# Altium PCB PCB1.PcbDoc (part 1 of 2)
Units mm, origin at the board's own origin, x right, y up, seen from the top; angles counter-clockwise.
Board outline 158 x 54 mm, 2 copper layers (Top Layer, Bottom Layer); 125 components, 171 nets, 620 pads, 107 vias.
Unrouted connection lines stored in the file: 178.
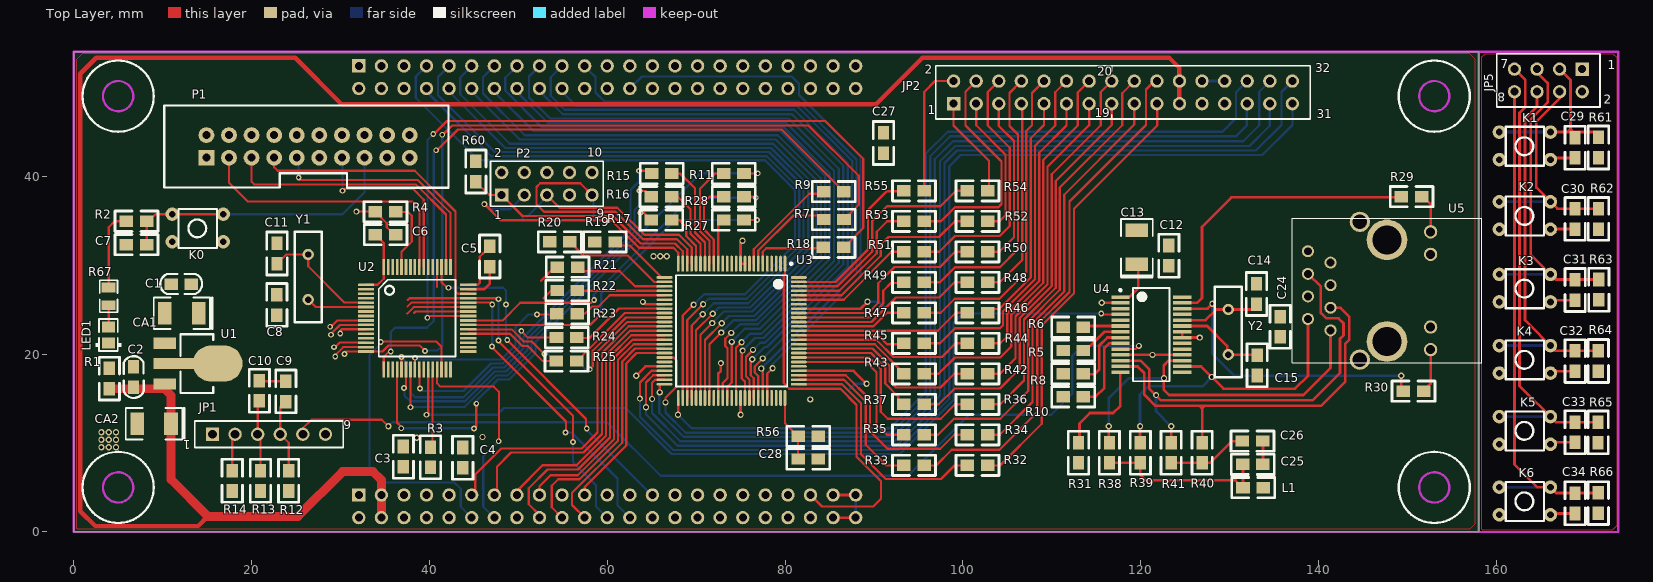
[diagram p0: Top Layer view]
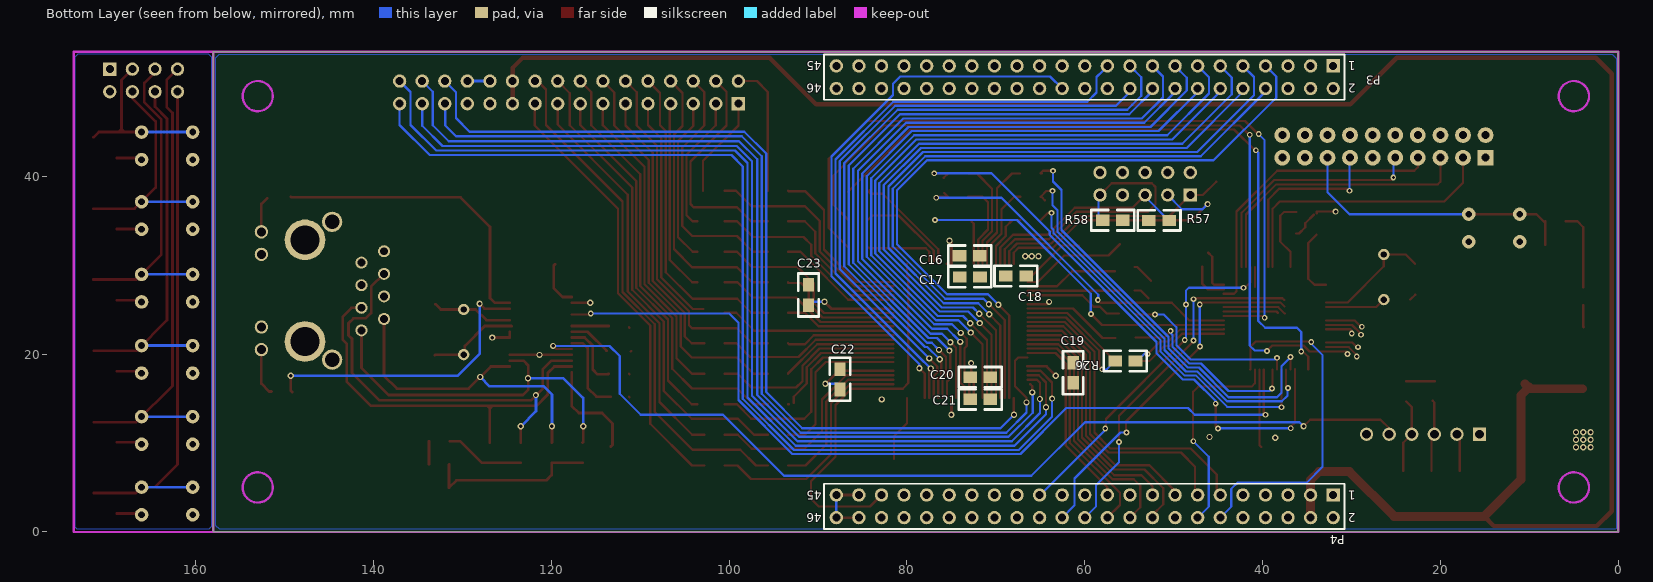
[diagram p1: Bottom Layer view, seen from below]

## Layer stack, top to bottom
Top Solder: solder mask 0.0102, Solder Resist, Dk 3.5
Top Layer: signal copper 0.0356
Dielectric1: dielectric 0.32, FR-4, Dk 4.8
Bottom Layer: signal copper 0.0356
Bottom Solder: solder mask 0.0102, Solder Resist, Dk 3.5

## Board outline
0,0 0,54 158,54 158,0

## Design rules (kind name [scope] priority, off if disabled: settings)
Clearance Clearance_2 [InNetClass('SMALL_CLEARANCE','CPLDDATA')] p1: gap=0.2
Clearance Clearance_1 [InComponent('U2','U3','U4')] p2: gap=0.2
Clearance [All] p3: gap=0.254
ComponentClearance [All] p1: gap=0 collisioncheckmode=3 verticalgap=0 showdistances=FALSE
FabricationTestPointUsage TestPointUsage [All] p1: valid=0 allowmultiple=FALSE
FabricationTestpoint Testpoint [All] p1: side=3 testpointundercomponent=TRUE minsize=1.016 maxsize=2.54 preferedsize=1.524 minholesize=0 maxholesize=1.016 preferedholesize=0.813 testpointgrid=0.025 allowsidetop=TRUE allowsidebottom=TRUE usegrid=TRUE gridtolerance=0
HoleSize [All] p1: absolutevalues=TRUE maxlimit=4 minlimit=0.025 maxpercent=80.000 minpercent=20.000
PolygonConnect [All] p1: connectstyle=Relief reliefconductorwidth=0.5 reliefentries=4 polygonreliefangle="90 Angle" airgapwidth=0.254
RoutingVias [All] p1: holewidth=0.35 width=0.65 viastyle="Through Hole" minholewidth=0.35 minwidth=0.65 maxholewidth=0.711 maxwidth=3
SolderMaskExpansion [All] p1: expansion=0.102
Width [All] p1: maxlimit=2 minlimit=0.24 preferedwidth=0.3 minimp=50.000000 maximp=50.000000 favimp=50.000000
25 further rules are at their usual default settings.

## Classes and differential pairs
net class CPLDDATA: CPLD_R CPLD_W DB0 DB1 DB2 DB3 DB4 DB5 DB6 DB7 GND GPIO_20 I2C1_SDA-O KEY1 KEY2 KEY3 KEY4 KEY5 KEY6 NetR32_2 NetR33_2 NetR34_2 NetR35_2 NetR36_2 NetR37_2 NetR42_2 NetR43_2 NetR44_2 NetR45_2 NetR46_2 NetR47_2 NetR48_2 NetR49_2 NetR50_2 NetR51_2 NetR52_2 NetR53_2 NetR54_2 NetR55_2 OUT_C\S\ OUT_C\S\-O PA0 PA1 PA2 PA3 PA4 PA5 PA6 PA7 PB0 PB1 PB2 PB3 PB4 PB5 PB6 PB7 SPI1-MISO SPI1-MISO-O SPI1-MOSI SPI1-MOSI-O SPI1-NSS SPI1-NSS-O SPI1-SCK SPI1-SCK-O TCK TDI TDO TMS UART2_RX UART2_RX-O UART2_TX UART2_TX-O
net class SMALL_CLEARANCE: BOOT1 CANRX CANTX ENABLE1 ENABLE2 ENC-INT LCD_DATA0 LCD_DATA1 LCD_DATA2 LCD_DATA3 LCD_DATA4 LCD_DATA5 LCD_DATA6 LCD_DATA7 LCD_DATA8 LCD_DATA9 LCD_DATA10 LCD_DATA11 LCD_DATA12 LCD_DATA13 LCD_DATA14 LCD_DATA15 LCD_DE LCD_HSYNC NetR9_2 NetR11_2 NetR15_2 NetR16_2 NetR17_2 NetR20_2 NetR21_2 NetR23_2 NetR24_2 PA0 PA1 PA2 PA3 PA4 PA5 PA6 PA7 PB0 PB1 PB2 PB3 PB4 PB5 PB6 PB7 UART3_RX UART3_TX

## Components (designator, comment, footprint, x,y, rotation, side; value= is the part's Value field where it differs from the comment)
C1 "0.1uF" 0805_CAP 12.93,27.74 r180 top
C2 "0.1uF" 0805_CAP 6.61,16.57 r90 top
C3 "104" C0805 37.07,7.06 r270 top
C4 "104" C0805 43.75,6.95 r270 top
C5 "104" C0805 46.79,29.57 r270 top
C6 "104" C0805 36.47,33.42 r0 top
C7 "104" C0805 8.46,32.3 r0 top
C8 "Cap" C0805 22.84,24.13 r270 top
C9 "101" C0805 23.85,14.4 r270 top
C10 "101" C0805 20.88,14.48 r270 top
C11 "Cap" C0805 22.87,29.91 r270 top
C12 "Cap Semi" C0805 123.16,32.46 r90 top
C13 "Cap Pol3" 1210C 119.59,30.13 r90 top
C14 "Cap Semi" C0805 133.01,28.15 r90 top
C15 "Cap Semi" C0805 133.09,17.33 r270 top
C16 "Cap" C0805 74.34,31.06 r0 bottom
C17 "Cap" C0805 74.32,28.66 r0 bottom
C18 "Cap" C0805 66.35,28.77 r180 bottom
C19 "Cap" C0805 61.31,19.29 r90 bottom
C20 "Cap" C0805 70.35,17.4 r180 bottom
C21 "Cap" C0805 70.35,14.9 r180 bottom
C22 "Cap" C0805 87.53,18.55 r90 bottom
C23 "Cap" C0805 91.07,28.03 r90 bottom
C24 "Cap Semi" C0805 135.67,21.67 r270 top
C25 "Cap Semi" C0805 131.2,7.59 r180 top
C26 "Cap Semi" C0805 131.17,10.21 r180 top
C27 "Cap" C0805 91.07,42.34 r270 top
C28 "Cap" C0805 81.21,8.2 r180 top
C29 "104" C0805 168.84,44.59 r90 top
C30 "104" C0805 168.84,36.594 r90 top
C31 "104" C0805 168.84,28.598 r90 top
C32 "104" C0805 168.84,20.602 r90 top
C33 "104" C0805 168.84,12.606 r90 top
C34 "104" C0805 168.84,4.61 r90 top
CA1 "4.7UF/16V" 3528cap 14.05,24.61 r180 top
CA2 "10UF/16V" 3528cap 10.92,12.18 r180 top
JP1 "ISP" PIN-FHEADER-1*6-2.54 15.61,10.98 r0 top
JP2 "Header2*16" PIN-S-2.54-2*16 98.95,48.18 r0 top locked
JP5 "Header2*4" PIN-S-2.54-2*4 169.64,52.04 r180 top
K0 "KEY" KEY-DIP 13.9,34.14 r180 top
K1 "SW-SPST" KEY-DIP 163.14,43.37 r180 top
K2 "SW-SPST" KEY-DIP 163.14,35.54 r180 top
K3 "SW-SPST" KEY-DIP 163.14,27.37 r180 top
K4 "SW-SPST" KEY-DIP 163.14,19.36 r180 top
K5 "SW-SPST" KEY-DIP 163.14,11.37 r180 top
K6 "SW-SPST" KEY-DIP 163.14,3.44 r180 top
L1 "Inductor" R0805 132.41,5.12 r180 top
LED1 "0805/Green" LED-0805 3.01,23.64 r270 top
P1 "Header 10X2" IDC-20 14.9,42.08 r0 top
P2 "Header 5X2" HDR2X5 48.13,37.88 r0 top
P3 "Header 23X2" HDR2X23 32.06,52.4 r0 bottom
P4 "Header 23X2" HDR2X23 32.06,4.144 r0 bottom
R1 "10K" 0805 4.01,18.38 r270 top
R2 "10k" R0805 7.29,34.78 r0 top
R3 "Res2" R0805 40.28,8.62 r90 top
R4 "Res2" R0805 35.29,35.84 r0 top
R5 "Res Semi" R0805 112.63,20.25 r0 top
R6 "Res Semi" R0805 112.63,22.86 r0 top
R7 "Res Semi" R0805 85.71,34.975 r0 top
R8 "Res Semi" R0805 112.63,17.63 r0 top
R9 "Res Semi" R0805 85.7,38.11 r0 top
R10 "Res Semi" R0805 112.63,15.04 r0 top
R11 "Res Semi" R0805 74.466,40.145 r0 top
R12 "Res2" R0805 24.03,5.51 r270 top
R13 "Res2" R0805 20.855,5.51 r270 top
R14 "Res2" R0805 17.68,5.51 r270 top
R15 "Res Semi" R0805 65.9,40.45 r180 top
R16 "Res Semi" R0805 65.88,37.84 r180 top
R17 "Res Semi" R0805 65.86,35.217 r180 top
R18 "Res Semi" R0805 85.68,31.84 r0 top
R19 "Res Semi" R0805 59.51,32.76 r180 top
R20 "Res Semi" R0805 54.43,32.77 r180 top
R21 "Res Semi" R0805 55.31,29.92 r180 top
R22 "Res Semi" R0805 55.28,27.3 r180 top
R23 "Res Semi" R0805 55.26,24.67 r180 top
R24 "Res Semi" R0805 55.21,22 r180 top
R25 "Res Semi" R0805 55.19,19.36 r180 top
R26 "Res Semi" R0805 55.21,19.06 r180 bottom
R27 "Res Semi" R0805 74.466,34.913 r0 top
R28 "Res Semi" R0805 74.466,37.535 r0 top
R29 "Res Semi" R0805 150.68,37.55 r0 top
R30 "Res Semi" R0805 150.9,15.67 r0 top
R31 "Res Semi" R0805 113.15,9.13 r90 top
R32 "Res2" R0805 101.404,7.63 r180 top
R33 "Res2" R0805 94.274,7.63 r180 top
R34 "Res2" R0805 101.404,11.061 r180 top
R35 "Res2" R0805 94.274,11.061 r180 top
R36 "Res2" R0805 101.404,14.492 r180 top
R37 "Res2" R0805 94.274,14.492 r180 top
R38 "Res Semi" R0805 116.625,9.13 r90 top
R39 "Res Semi" R0805 120.1,9.13 r90 top
R40 "Res Semi" R0805 127.05,9.13 r90 top
R41 "Res Semi" R0805 123.575,9.13 r90 top
R42 "Res2" R0805 101.404,17.923 r180 top
R43 "Res2" R0805 94.274,17.923 r180 top
R44 "Res2" R0805 101.404,21.355 r180 top
R45 "Res2" R0805 94.274,21.355 r180 top
R46 "Res2" R0805 101.404,24.786 r180 top
R47 "Res2" R0805 94.274,24.786 r180 top
R48 "Res2" R0805 101.404,28.217 r180 top
R49 "Res2" R0805 94.274,28.217 r180 top
R50 "Res2" R0805 101.404,31.648 r180 top
R51 "Res2" R0805 94.274,31.648 r180 top
R52 "Res2" R0805 101.404,35.079 r180 top
R53 "Res2" R0805 94.274,35.079 r180 top
R54 "Res2" R0805 101.404,38.51 r180 top
R55 "Res2" R0805 94.274,38.51 r180 top
R56 "Res2" R0805 82.83,10.59 r0 top
R57 "Res2" R0805 51.87,35.18 r0 bottom
R58 "Res2" R0805 56.62,34.89 r180 bottom
R60 "Res2" R0805 45.07,40.3 r270 top
R61 "Res2" R0805 171.32,42.99 r270 top
R62 "Res2" R0805 171.32,34.97 r270 top
R63 "Res2" R0805 171.35,27.01 r270 top
R64 "Res2" R0805 171.29,18.99 r270 top
R65 "Res2" R0805 171.27,10.96 r270 top
R66 "Res2" R0805 171.29,3.01 r270 top
R67 "1K/1%/0805/1/8W" R-0805 4.83,24.99 r90 top
U1 "AS1117-3.3V" SOT-223 16.17,18.93 r270 top
U2 "STM32" LQFP64 32.87,27.78 r0 top locked
U3 "EPM240GT100C5N" TQFP100_N 73.99,22.61 r270 top locked
U4 "ENC28J60" ENC28J60-ss 121.18,22.18 r0 top
U5 "HR911105A-RJ45" HR911105A 147.69,27.12 r270 top locked
Y1 "8MHZ" XTAL 26.37,26.12 r90 top
Y2 "25M" xtal 129.84,25.01 r270 top

## Footprints (in the part's own frame and the unit in brackets; to place one, negate y for a bottom-side part, rotate by r counter-clockwise, add the part's x,y. Pads: shape width x height; smd on the part's side, far side on the other; paste and mask are expansions set on the pad)
0805 [mil]
  rect 60x50 smd: 1(0,0) 2(90,0)
  silkscreen extent -50,-45 140,45
0805_CAP [mm]
  rect 1.524x1.27 smd: 1(-0.31,-0.11) 2(1.976,-0.11)
  silkscreen extent -1.51,-1.26 3.19,0.99
1210C [mil]
  rect 60x100 smd: 1(-1,1) 2(149,1)
  silkscreen extent -61,-69 199,71
3528cap [mil]
  rect 60x100 smd: 1(-1,1) 2(149,1)
  silkscreen extent -61,-69 199,71
C0805 [mil]
  rect 60x50 smd: 1(-100,0) 2(-10,0)
  silkscreen extent -150,-45 40,45
ENC28J60-ss [mm] "SOP, 28-Leads, Body 10.5x5.6mm (max), Pitch 0"
  rect 2.05x0.4 smd: 1(-3.475,4.225) 2(-3.475,3.575) 3(-3.475,2.925) 4(-3.475,2.275) 5(-3.475,1.625) 6(-3.475,0.975) 7(-3.475,0.325) 8(-3.475,-0.325) 9(-3.475,-0.975) 10(-3.475,-1.625) 11(-3.475,-2.275) 12(-3.475,-2.925) 13(-3.475,-3.575) 14(-3.475,-4.225) 15(3.475,-4.225) 16(3.475,-3.575) 17(3.475,-2.925) 18(3.475,-2.275) 19(3.475,-1.625) 20(3.475,-0.975) 21(3.475,-0.325) 22(3.475,0.325) 23(3.475,0.975) 24(3.475,1.625) 25(3.475,2.275) 26(3.475,2.925) 27(3.475,3.575) 28(3.475,4.225)
  silkscreen extent -3.6,-5.25 2.05,5.25, body extent -2.8,-5.25 2.8,5.25, height 2
HDR2X5 [mm] "Connector; Header; 5x2 Position"
  rect 1.5x1.5 hole 0.9: 1(0,0)
  round 1.5 hole 0.9: 2(0,2.54) 3(2.54,0) 4(2.54,2.54) 5(5.08,0) 6(5.08,2.54) 7(7.62,0) 8(7.62,2.54) 9(10.16,0) 10(10.16,2.54)
  silkscreen extent -1.27,-1.27 11.43,3.81
HDR2X23 [mm] "Connector; Header; 23x2 Position"
  rect 1.5x1.5 hole 0.9: 1(0,0)
  round 1.5 hole 0.9: 2(0,2.54) 3(2.54,0) 4(2.54,2.54) 5(5.08,0) 6(5.08,2.54) 7(7.62,0) 8(7.62,2.54) 9(10.16,0) 10(10.16,2.54) 11(12.7,0) 12(12.7,2.54) 13(15.24,0) 14(15.24,2.54) 15(17.78,0) 16(17.78,2.54) 17(20.32,0) 18(20.32,2.54) 19(22.86,0) 20(22.86,2.54) 21(25.4,0) 22(25.4,2.54) 23(27.94,0) 24(27.94,2.54) 25(30.48,0) 26(30.48,2.54) 27(33.02,0) 28(33.02,2.54) 29(35.56,0) 30(35.56,2.54) 31(38.1,0) 32(38.1,2.54) 33(40.64,0) 34(40.64,2.54) 35(43.18,0) 36(43.18,2.54) 37(45.72,0) 38(45.72,2.54) 39(48.26,0) 40(48.26,2.54) 41(50.8,0) 42(50.8,2.54) 43(53.34,0) 44(53.34,2.54) 45(55.88,0) 46(55.88,2.54)
  silkscreen extent -1.27,-1.27 57.28,3.81
HR911105A [mm]
  round 1.35 hole 0.89: 1(4.46,-6.35) 2(3.18,-8.89) 3(1.92,-6.35) 4(0.64,-8.89) 5(-0.62,-6.35) 6(-1.9,-8.89) 7(-3.16,-6.35) 8(-4.44,-8.89)
  round 1.5 hole 1.02: 9(6.625,4.9) 10(4.085,4.9) 11(-4.085,4.9) 12(-6.625,4.9)
  round 2.286 hole 1.63: ""(-7.745,-3.05) ""(7.745,-3.05)
  round 4.572 hole 3.25: ""(-5.715,0) ""(5.715,0)
  silkscreen extent -8.13,-10.67 8.13,10.67
IDC-20 [mil]
  rect 70x70 hole 35: 1(1,0)
  round 70 hole 35: 2(1,100) 3(101,0) 4(101,100) 5(201,0) 6(201,100) 7(301,0) 8(301,100) 9(401,0) 10(401,100) 11(501,0) 12(501,100) 13(601,0) 14(601,100) 15(701,0) 16(701,100) 17(801,0) 18(801,100) 19(901,0) 20(901,100)
  silkscreen extent -185,-133 1073,231
KEY-DIP [mil]
  round 60 hole 30: 1(-115,59.45) 2(-115,-62.6) 3(111,-62.6) 4(111,59.45)
  silkscreen extent -87,-86 83,87
LED-0805 [mm]
  rect 1.2x1.5 smd: 1(0.6,0.9) 2(2.4,0.9)
  silkscreen extent -0.3,-0.55 3.3,2.35
LQFP64 [mm]
  oval 1.8x0.3 smd: 1(0,0)
  rect 1.8x0.3 smd: 2(0,-0.5) 3(0,-1) 4(0,-1.5) 5(0,-2) 6(0,-2.5) 7(0,-3) 8(0,-3.5) 9(0,-4) 10(0,-4.5) 11(0,-5) 12(0,-5.5) 13(0,-6) 14(0,-6.5) 15(0,-7) 16(0,-7.5) 33(11.5,-7.5) 34(11.5,-7) 35(11.5,-6.5) 36(11.5,-6) 37(11.5,-5.5) 38(11.5,-5) 39(11.5,-4.5) 40(11.5,-4) 41(11.5,-3.5) 42(11.5,-3) 43(11.5,-2.5) 44(11.5,-2) 45(11.5,-1.5) 46(11.5,-1) 47(11.5,-0.5) 48(11.5,0)
  rect 0.3x1.8 smd: 17(2,-9.5) 18(2.5,-9.5) 19(3,-9.5) 20(3.5,-9.5) 21(4,-9.5) 22(4.5,-9.5) 23(5,-9.5) 24(5.5,-9.5) 25(6,-9.5) 26(6.5,-9.5) 27(7,-9.5) 28(7.5,-9.5) 29(8,-9.5) 30(8.5,-9.5) 31(9,-9.5) 32(9.5,-9.5) 49(9.5,2) 50(9,2) 51(8.5,2) 52(8,2) 53(7.5,2) 54(7,2) 55(6.5,2) 56(6,2) 57(5.5,2) 58(5,2) 59(4.5,2) 60(4,2) 61(3.5,2) 62(3,2) 63(2.5,2) 64(2,2)
  silkscreen extent 1.43,-8.07 10.07,0.56
PIN-FHEADER-1*6-2.54 [mm]
  rect 1.5x1.5 hole 1: 1(0,0)
  round 1.5 hole 1: 2(2.54,0) 3(5.08,0) 4(7.62,0) 5(10.16,0) 6(12.7,0)
  silkscreen extent -2,-1.5 14.7,1.5
PIN-S-2.54-2*4 [mm]
  rect 1.5x1.5 hole 0.9: 1(0,0)
  round 1.5 hole 0.9: 2(0,2.54) 3(2.54,0) 4(2.54,2.54) 5(5.08,0) 6(5.08,2.54) 7(7.62,0) 8(7.62,2.54)
  silkscreen extent -2,-1.73 9.62,4.27
PIN-S-2.54-2*16 [mm]
  rect 1.5x1.5 hole 0.9: 1(0,-0.025)
  round 1.5 hole 0.9: 2(0,2.515) 3(2.54,-0.025) 4(2.54,2.515) 5(5.08,-0.025) 6(5.08,2.515) 7(7.62,-0.025) 8(7.62,2.515) 9(10.16,-0.025) 10(10.16,2.515) 11(12.7,-0.025) 12(12.7,2.515) 13(15.24,-0.025) 14(15.24,2.515) 15(17.78,-0.025) 16(17.78,2.515) 17(20.32,-0.025) 18(20.32,2.515) 19(22.86,-0.025) 20(22.86,2.515) 21(25.4,-0.025) 22(25.4,2.515) 23(27.94,-0.025) 24(27.94,2.515) 25(30.48,-0.025) 26(30.48,2.515) 27(33.02,-0.025) 28(33.02,2.515) 29(35.56,-0.025) 30(35.56,2.515) 31(38.1,-0.025) 32(38.1,2.515)
  silkscreen extent -2,-1.76 40.1,4.24
R0805 [mil]
  rect 60x50 smd: 1(-54,6) 2(36,6)
  silkscreen extent -104,-39 86,51
R-0805 [mm]
  rect 1.1x1.6 smd: 1(0.5,0.9) 2(2.5,0.9)
  silkscreen extent -0.3,-0.1 3.3,1.9
SOT-223 [mil]
  rect 50x100 smd: 1(-90.5,-234) 3(90.5,-234)
  oval 160x220 smd: 2(0,1)
  rect 50x200 smd: 2(0,-184)
  silkscreen extent -130,-164 130,-19
TQFP100_N [mm] "100-Pin Plastic Thin Quad Flat Pack (TQFP100), IPC Medium Density"
  oval 1.8x0.3 smd: 1(-7.55,6) 2(-7.55,5.5) 3(-7.55,5) 4(-7.55,4.5) 5(-7.55,4) 6(-7.55,3.5) 7(-7.55,3) 8(-7.55,2.5) 9(-7.55,2) 10(-7.55,1.5) 11(-7.55,1) 12(-7.55,0.5) 13(-7.55,0) 14(-7.55,-0.5) 15(-7.55,-1) 16(-7.55,-1.5) 17(-7.55,-2) 18(-7.55,-2.5) 19(-7.55,-3) 20(-7.55,-3.5) 21(-7.55,-4) 22(-7.55,-4.5) 23(-7.55,-5) 24(-7.55,-5.5) 25(-7.55,-6) 51(7.55,-6) 52(7.55,-5.5) 53(7.55,-5) 54(7.55,-4.5) 55(7.55,-4) 56(7.55,-3.5) 57(7.55,-3) 58(7.55,-2.5) 59(7.55,-2) 60(7.55,-1.5) 61(7.55,-1) 62(7.55,-0.5) 63(7.55,0) 64(7.55,0.5) 65(7.55,1) 66(7.55,1.5) 67(7.55,2) 68(7.55,2.5) 69(7.55,3) 70(7.55,3.5) 71(7.55,4) 72(7.55,4.5) 73(7.55,5) 74(7.55,5.5) 75(7.55,6)
  oval 0.3x1.8 smd: 26(-6,-7.55) 27(-5.5,-7.55) 28(-5,-7.55) 29(-4.5,-7.55) 30(-4,-7.55) 31(-3.5,-7.55) 32(-3,-7.55) 33(-2.5,-7.55) 34(-2,-7.55) 35(-1.5,-7.55) 36(-1,-7.55) 37(-0.5,-7.55) 38(0,-7.55) 39(0.5,-7.55) 40(1,-7.55) 41(1.5,-7.55) 42(2,-7.55) 43(2.5,-7.55) 44(3,-7.55) 45(3.5,-7.55) 46(4,-7.55) 47(4.5,-7.55) 48(5,-7.55) 49(5.5,-7.55) 50(6,-7.55) 76(6,7.55) 77(5.5,7.55) 78(5,7.55) 79(4.5,7.55) 80(4,7.55) 81(3.5,7.55) 82(3,7.55) 83(2.5,7.55) 84(2,7.55) 85(1.5,7.55) 86(1,7.55) 87(0.5,7.55) 88(0,7.55) 89(-0.5,7.55) 90(-1,7.55) 91(-1.5,7.55) 92(-2,7.55) 93(-2.5,7.55) 94(-3,7.55) 95(-3.5,7.55) 96(-4,7.55) 97(-4.5,7.55) 98(-5,7.55) 99(-5.5,7.55) 100(-6,7.55)
  silkscreen extent -7.67,-6.25 6.25,6.83, body extent -7,-7 7,7, height 1.2
XTAL [mil]
  round 50 hole 28: 1(0,0) 2(200,0)
  silkscreen extent -100,-60 300,60
xtal [mil]
  round 50 hole 28: 1(0,0) 2(200,0)
  silkscreen extent -100,-60 300,60

## Part data
C1 C2: library part C
C3 C4 C5 C6: library part CAP, "Capacitor"
C7 C9 C10 C29 C30 C31 C32 C33 C34: library part Cap, "Capacitor"
C8 C11 C16 C17 C18 C19 C20 C21 C22 C23 C27 C28: "Capacitor"
C12 C14 C15 C24 C25 C26: "Capacitor (Semiconductor SIM Model)"
C13: "Polarized Capacitor (Surface Mount)"
CA1 CA2: library part ECAP
JP1: library part Header1*6
K1 K2 K3 K4 K5 K6: "Single-Pole, Single-Throw Switch"
LED1: library part ASD-0012AA
P1: "Header, 10-Pin, Dual row"
P2: "Header, 5-Pin, Dual row"
P3 P4: "Header, 23-Pin, Dual row"
R1: library part Res2, "Resistor"
R2: library part Res3, "Resistor"
R3 R4 R12 R13 R14 R32 R33 R34 R35 R36 R37 R42 R43 R44 R45 R46 R47 R48 R49 R50 R51 R52 R53 R54 R55 R56 R57 R58 R60 R61 R62 R63 R64 R65 R66: "Resistor"
R5 R6 R7 R8 R9 R10 R11 R15 R16 R17 R18 R19 R20 R21 R22 R23 R24 R25 R26 R27 R28 R29 R30 R31 R38 R39 R40 R41: "Semiconductor Resistor"
R67: library part ASR-0028BA
U1: library part AS1117
U2: library part STM32F103RE
U3: "MAX II 1.8V CPLD, 80 IOs, 240 Logic Elements, 100-Pin Plastic TQFP, Commercial Temperature, Speed Grade 5, Pb-Free"
Y1 Y2: library part XTAL, "Crystal Oscillator"

## Via types
v1: diameter 0.7, hole 0.4, Top Layer to Bottom Layer, 59 vias
v2: diameter 0.65, hole 0.35, Top Layer to Bottom Layer, 48 vias

## Nets (pads, with @x,y where several pads share a name; then routed paths per layer and width w, separated by ;. In a path a pad name is that pad's centre, name@x,y a point inside that pad or via, vN(x,y) a via of type N, cw(c..) or ccw(c..) an arc to the next point about the centre after c; other vN are vias at no path point)
BOOT0: R4.2 U2.60 | length 8.2
  Top Layer w0.24: R4.2@36.204,35.992 37.578,35.992 38.02,35.55 38.02,32.64 36.87,31.49 U2.60@36.87,29.78
BOOT1: R3.2 U2.28 | length 8.8
  Top Layer w0.24: R3.2@40.128,9.534 40.37,9.777 U2.28@40.37,18.28
CANRX: P4.26 U2.44 | length 40.4
  Top Layer w0.24: 37.52,25.33 37.529,25.33 37.979,25.78 U2.44@44.37,25.78 46.95,25.78 47.07,25.66 v2(47.07,25.58) ; v2(47.04,20.84) 47.04,20.75 55.37,12.42 v2@55.37,11.18
  Bottom Layer w0.24: v2@47.07,21.11 v2(47.07,25.58) ; v2(55.32,11.18) 55.99,11.18 61.16,6.01 61.16,2.984 P4.26@62.54,1.604
CANTX: P4.24 U2.45 | length 40.1
  Top Layer w0.24: 37.57,26.07 37.78,26.28 U2.45@44.37,26.28 47.67,26.28 v2(47.78,26.17) ; v2(47.78,21.52) 47.7,21.52 56.15,13.07 v2@56.15,10.1
  Bottom Layer w0.24: v2(47.78,21.52) v2(47.78,26.17) ; v2(56.14,10.1) 56.14,7.86 58.72,5.28 58.72,2.884 P4.24@60,1.604
CLK0: U3.12
CPLD_R: R28.1 U3.17 | length 9.8
  Top Layer w0.254: U3.17@71.99,30.16 71.99,32.89 70.88,34 70.88,37.07 71.498,37.688 R28.1@73.094,37.688
CPLD_W: R27.1 U3.16 | length 4.8
  Top Layer w0.254: U3.16@72.49,30.16 72.49,34.68 R27.1@72.7,34.89
DB0: R19.1 U3.26 | length 7.3
  Top Layer w0.254: R19.1@60.66,32.199 62.531,32.199 66.12,28.61 U3.26@66.44,28.61
DB1: R20.1 U3.27 | length 12.2
  Top Layer w0.254: R20.1@56.04,32.36 57.33,31.07 62.32,31.07 65.28,28.11 U3.27@66.44,28.11
DB2: R21.1 U3.28 | length 10.5
  Top Layer w0.254: R21.1@56.63,29.31 61.41,29.31 63.11,27.61 U3.28@66.44,27.61
DB3: R22.1 U3.29 | length 10.3
  Top Layer w0.254: R22.1@56.12,27.094 56.136,27.11 U3.29@66.44,27.11
DB4: R23.1 U3.30 | length 11.1
  Top Layer w0.254: R23.1@56.15,24.57 57.538,24.57 58.276,25.308 58.39,25.308 58.404,25.322 58.992,25.322 60.28,26.61 U3.30@66.44,26.61
DB5: R24.1 U3.33 | length 11.2
  Top Layer w0.254: R24.1@56.582,21.791 58.001,21.791 61.32,25.11 U3.33@66.44,25.11
DB6: R25.1 U3.34 | length 12.5
  Top Layer w0.254: R25.1@56.219,19.139 56.509,19.139 61.98,24.61 U3.34@66.44,24.61
DB7: R26.1 U3.35 | length 13.7
  Top Layer w0.254: v2(58.04,18.28) 58.38,18.62 58.38,20.368 62.122,24.11 U3.35@66.44,24.11
  Bottom Layer w0.24: R26.1@56.582,19.212 57.514,18.28 v2(58.04,18.28)
ENABLE1: P4.16 U2.14 | length 3.5
  Top Layer w0.24: v2@29.52,20.9 29.9,21.28 U2.14@32.87,21.28
  other v2: 29.27,20.77
ENABLE2: P4.23 U2.15 | length 3.7
  Top Layer w0.24: v2@29.51,19.94 29.51,19.972 30.318,20.78 U2.15@32.87,20.78
  other v2: 29.41,19.72
ENC-INT: U2.27 U4.4 | length 97.5
  Top Layer w0.24: v2(39.67,13.17) 39.88,13.17 39.87,13.18 U2.27@39.87,18.28
  Top Layer w0.254: v2(115.56,24.55) 115.655,24.455 U4.4@117.705,24.455
  Bottom Layer w0.254: v2(39.67,13.17) 39.68,13.16 47.63,13.16 48.39,13.92 62.07,13.92 67.224,8.766 92.898,8.766 98.95,14.818 98.95,23.51 99.99,24.55 v2(115.56,24.55)
GND: C1.2 C2.2 C3.2 C4.2 C5.2 C6.2 C7.1 C8.2 C9.1 C10.1 C11.1 C12.2 C13.2 C14.2 C15.2 C16.1 C17.1 C18.1 C19.1 C20.1 C21.1 C22.1 C23.1 C24.2 C25.1 C26.1 C27.1 C28.1 C29.1 C30.1 C31.1 C32.1 C33.1 C34.1 CA1.2 CA2.2 JP1.6 JP2.24 JP2.26 JP5.2 K0.1 K0.4 K1.1 K1.4 K2.1 K2.4 K3.1 K3.4 K4.1 K4.4 K5.1 K5.4 K6.1 K6.4 LED1.2 P1.4 P1.6 P1.8 P1.10 P1.11 P1.12 P1.14 P1.16 P1.18 P1.20 P2.2 P2.10 P3.1 P3.2 P4.1 P4.2 P4.43 P4.44 P4.45 P4.46 R1.1 R3.1 R4.1 R31.1 R60.1 U1.1 U2.12 U2.18 U2.31 U2.47 U2.63 U3.10 U3.11 U3.32 U3.46 U3.60 U3.65 U3.79 U3.93 U4.2 U4.11 U4.18 U4.21 U4.22 U5.8 U5.10 U5.11 | length 90.6
  Top Layer w0.254: C10.1@20.63,16.95 20.64,16.94 C9.1@23.85,16.94 ; v1(31.79,36.02) 33.891,36.02 R4.1@33.918,35.992 R4.1@33.918,35.842 ; R4.1@34.23,35.68 35.2,34.71 35.2,34.25 35.906,33.544 C6.2@36.216,33.544 ; v1(64.01,25.86) 64.26,25.61 U3.32@66.44,25.61
  Top Layer w0.3: U2.47@44.37,27.28 46.16,27.28 46.79,27.91 C5.2@46.79,29.824 ; v1@63.325,17.635 64.3,18.61 U3.46@66.44,18.61 ; U3.60@72.49,15.06 72.49,17.82 72.78,18.11 v1(72.78,18.98) ; v1(74.99,13.17) U3.65@74.99,15.06 ; v1(75.21,32.75) 74.99,32.53 U3.11@74.99,30.16 U3.10@75.49,30.16 ; U3.79@81.54,18.11 87.71,18.11 v1(89.17,16.65) ; U3.93@81.54,25.11 88.51,25.11 v1(89.27,25.87) ; P4.44@85.4,1.604 P4.46@87.94,1.604 ; P4.43@85.4,4.144 P4.45@87.94,4.144 ; v1(115.605,25.755) U4.2@117.705,25.755 ; U4.11@117.705,19.905 U4.18@124.655,19.905 ; U4.22@124.655,22.505 U4.21@124.655,21.855 v1(126.625,21.855) ; C26.1@133.71,10.21 133.74,10.18 C25.1@133.74,7.59 ; K3.1@165.99,25.61 166.438,26.058 C31.1@168.84,26.058 ; K6.1@166.061,1.93 166.201,2.07 C34.1@168.84,2.07 ; K5.1@166.061,9.86 166.267,10.066 C33.1@168.84,10.066 ; K4.1@166.061,17.85 166.273,18.062 C32.1@168.84,18.062 ; K2.1@166.061,34.03 166.085,34.054 C30.1@168.84,34.054 ; K1.1@166.061,41.86 166.251,42.05 C29.1@168.84,42.05
  Bottom Layer w0.3: C22.1@87.32,16.12 87.85,16.65 v1(89.17,16.65) ; P4.46@87.94,1.604 P4.45@87.94,4.144 ; v1(89.27,25.87) 90.54,25.87 C23.1@91.13,25.28 ; JP2.24@126.89,50.695 JP2.26@129.43,50.695
  other v1: 3.12,9.51 3.94,9.51 4.76,9.51 3.12,10.355 3.94,10.355 4.76,10.355 38.59,10.58 45.97,10.67 3.12,11.2 3.94,11.2 4.76,11.2 82.82,14.9 63.26,17.57 121.32,19.905 65.2,31 65.95,31 66.7,31
GPIO_20: P4.41 U3.1 | length 43.2
  Top Layer w0.254: U3.1@79.99,30.16 79.99,28.89 79.84,28.74 79.84,16.73 80.48,16.09 86.23,16.09 88.04,14.28 88.04,8.45 90.79,5.7 90.79,3.72 89.92,2.85 84.154,2.85 P4.41@82.86,4.144
I2C1_SCL: P4.19 U2.58
I2C1_SDA: U2.59 U3.15
I2C1_SDA-O: P4.20 U3.41 | length 28.7
  Top Layer w0.254: P4.20@54.92,1.604 53.76,2.764 53.76,5.18 54.486,5.906 56.886,5.906 61.222,10.242 61.222,19.358 62.974,21.11 U3.41@66.44,21.11
IO2: U3.2
IO3: U3.3
IO4: U3.4
IO5: U3.5
IO72: U3.72
IO73: U3.73
IO74: U3.74
IO100: U3.100
JNTRST: P1.3 U2.56 | length 32
  Top Layer w0.24: P1.3@17.465,42.08 17.465,39.255 19.55,37.17 38.05,37.17 38.87,36.35 U2.56@38.87,29.78
JTCK: P1.9 U2.49 | length 27.1
  Top Layer w0.24: v2(25.3,39.84) 25.568,39.572 38.689,39.572 42.364,35.897 42.364,29.786 U2.49@42.37,29.78
  Bottom Layer w0.24: P1.9@25.085,42.08 25.3,41.865 v2(25.3,39.84)
JTDI: P1.5 U2.50 | length 32
  Top Layer w0.24: P1.5@20.005,42.08 20.005,39.365 20.292,39.078 38.485,39.078 41.87,35.693 U2.50@41.87,29.78
JTDO: P1.13 U2.55 | length 20.5
  Top Layer w0.24: 30.506,38.584 38.155,38.584 39.37,37.369 U2.55@39.37,29.78
  Bottom Layer w0.24: P1.13@30.165,42.08 30.24,42.005 v2@30.24,38.57
  other v2: 30.22,38.36
JTMS: P1.7 U2.46 | length 34.1
  Top Layer w0.24: P1.7@22.545,42.08 22.545,40.995 22.93,40.61 38.35,40.61 42.93,36.03 42.93,27.05 43.2,26.78 U2.46@44.37,26.78
KEY1: C29.2 JP2.27 JP5.3 K1.2 K1.3 R61.1 U3.44 | length 126.3
  Top Layer w0.254: U3.44@66.44,19.61 67.49,19.61 67.85,19.25 67.85,16.38 66.55,15.08 v1(66.55,14.56)
  Top Layer w0.3: K1.2@166.061,44.96 170.874,44.96 R61.1@171.472,44.362 ; JP5.3@167.1,52.04 168.33,50.81 168.33,45.3 ; 167.99,44.96 168.33,45.3 ; C29.2@168.67,44.96 168.33,45.3
  Bottom Layer w0.254: v1@66.56,14.59 66.56,13.42 68.82,11.16 91.94,11.16 96.32,15.54 96.32,42.24 98.58,44.5 130.72,44.5 131.93,45.71 131.93,48.115 JP2.27@131.97,48.155
  Bottom Layer w0.3: K1.3@160.321,44.96 K1.2@166.061,44.96
KEY2: C30.2 JP2.28 JP5.4 K2.2 K2.3 R62.1 U3.51 | length 125.7
  Top Layer w0.254: v1(67.96,13.17) 67.99,13.2 U3.51@67.99,15.06
  Top Layer w0.3: JP5.4@167.1,49.5 167.1,48.75 164.49,46.14 164.49,38.701 166.849,36.342 R62.1@171.472,36.342
  Bottom Layer w0.254: v1(67.96,13.17) 69.47,11.66 91.76,11.66 95.82,15.72 95.82,42.55 98.28,45.01 129.2,45.01 130.72,46.53 130.72,49.445 JP2.28@131.97,50.695
  Bottom Layer w0.3: K2.3@160.321,37.13 K2.2@166.061,37.13
KEY3: C31.2 JP2.29 JP5.5 K3.2 K3.3 R63.1 U3.49 | length 145.1
  Top Layer w0.254: v1(65.04,14.94) 65.04,16.77 65.38,17.11 U3.49@66.44,17.11
  Top Layer w0.3: JP5.5@164.56,52.04 164.56,51.66 165.75,50.47 165.75,48.3 163.85,46.4 163.85,31.171 166.639,28.382 R63.1@171.502,28.382
  Bottom Layer w0.254: v1(65.04,14.94) 65.04,13.37 68.22,10.19 92.31,10.19 97.42,15.3 97.42,41.68 99.13,43.39 132.22,43.39 134.51,45.68 JP2.29@134.51,48.155
  Bottom Layer w0.3: K3.3@160.321,28.96 K3.2@166.061,28.96
KEY4: C32.2 JP2.30 JP5.6 K4.2 K4.3 R64.1 U3.50 | length 149.1
  Top Layer w0.254: v1(65.9,15.68) 65.9,16.37 U3.50@66.163,16.633
  Top Layer w0.3: JP5.6@164.56,49.5 164.56,47.817 163.2,46.457 163.2,23.811 166.649,20.362 R64.1@171.442,20.362
  Bottom Layer w0.254: v1(65.9,15.68) 65.86,15.64 65.86,13.41 68.58,10.69 92.13,10.69 96.83,15.39 96.83,41.9 98.87,43.94 131.53,43.94 133.31,45.72 133.31,49.495 JP2.30@134.51,50.695
  Bottom Layer w0.3: K4.3@160.321,20.95 K4.2@166.061,20.95
KEY5: C33.2 JP2.31 JP5.7 K5.2 K5.3 R65.1 U3.47 | length 167.6
  Top Layer w0.254: v1(63.68,14.99) 63.68,16.81 64.98,18.11 U3.47@66.44,18.11
  Top Layer w0.3: JP5.7@162.02,52.04 163.25,50.81 163.25,47.79 162.59,47.13 162.59,16.431 166.689,12.332 R65.1@171.422,12.332
  Bottom Layer w0.254: v1(63.68,14.99) 63.68,12.96 67.42,9.22 92.71,9.22 98.45,14.96 98.45,41.09 99.73,42.37 133.67,42.37 137.05,45.75 JP2.31@137.05,48.155
  Bottom Layer w0.3: K5.3@160.321,12.96 K5.2@166.061,12.96
KEY6: C34.2 JP2.32 JP5.8 K6.2 K6.3 R66.1 U3.48 | length 173.1
  Top Layer w0.254: v1(64.36,14.01) 64.36,16.8 65.17,17.61 U3.48@66.44,17.61
  Top Layer w0.3: JP5.8@162.02,49.5 162.02,7.59 164.58,5.03 K6.2@166.061,5.03 166.709,4.382 R66.1@171.442,4.382
  Bottom Layer w0.254: v1(64.36,14.01) 64.36,13.23 67.9,9.69 92.51,9.69 97.94,15.12 97.94,41.48 99.34,42.88 132.94,42.88 135.82,45.76 135.82,49.465 JP2.32@137.05,50.695
  Bottom Layer w0.3: K6.3@160.321,5.03 K6.2@166.061,5.03
LCD_DATA0: JP2.19 R32.1 | length 49.4
  Top Layer w0.254: R32.1@102.776,7.478 104.178,7.478 108.85,12.15 108.85,23.206 112.48,26.836 112.48,36.33 121.84,45.69 121.84,48.125 JP2.19@121.81,48.155
LCD_DATA1: JP2.20 R33.1 | length 58.1
  Top Layer w0.254: R33.1@95.646,7.478 96.968,7.478 98.74,9.25 104.12,9.25 108.36,13.49 108.36,23.358 111.97,26.968 111.97,37.15 120.58,45.76 120.58,49.76 JP2.20@121.68,50.86
LCD_DATA2: JP2.17 R34.1 | length 44.9
  Top Layer w0.254: R34.1@102.776,10.909 104.139,10.909 107.83,14.6 107.83,23.47 111.38,27.02 111.38,37.92 119.27,45.81 JP2.17@119.27,48.155
LCD_DATA3: JP2.18 R35.1 | length 53.5
  Top Layer w0.254: R35.1@95.646,10.909 97.199,10.909 99,12.71 104.21,12.71 107.34,15.84 107.34,23.67 110.9,27.23 110.9,38.72 117.91,45.73 117.91,49.335 JP2.18@119.27,50.695
LCD_DATA4: JP2.15 R36.1 | length 39.6
  Top Layer w0.254: 103.576,14.34 104.2,14.34 106.87,17.01 106.87,23.88 110.44,27.45 110.44,39.47 116.73,45.76 JP2.15@116.73,48.155
LCD_DATA5: JP2.16 R37.1 | length 49
  Top Layer w0.254: R37.1@95.646,14.34 97.29,14.34 99.08,16.13 104.17,16.13 106.38,18.34 106.38,24.05 109.98,27.65 109.98,40.23 115.49,45.74 115.49,49.455 JP2.16@116.73,50.695
LCD_DATA6: JP2.13 R42.1 | length 35.9
  Top Layer w0.254: R42.1@102.776,17.771 104.161,17.771 105.91,19.52 105.91,24.23 109.52,27.84 109.52,41.07 114.19,45.74 JP2.13@114.19,48.155
LCD_DATA7: JP2.14 R43.1 | length 44.5
  Top Layer w0.254: R43.1@95.646,17.771 97.261,17.771 99.11,19.62 104.2,19.62 105.44,20.86 105.44,24.41 109.04,28.01 109.04,41.82 112.91,45.69 112.91,49.415 JP2.14@114.19,50.695
LCD_DATA8: JP2.11 R44.1 | length 31.5
  Top Layer w0.254: R44.1@102.776,21.202 104.192,21.202 104.97,21.98 104.97,24.61 108.58,28.22 108.58,42.64 111.65,45.71 JP2.11@111.65,48.155
LCD_DATA9: JP2.12 R45.1 | length 40.1
  Top Layer w0.254: R45.1@95.646,21.202 97.422,21.202 99.11,22.89 104.16,22.89 104.51,23.24 104.51,24.81 108.1,28.4 108.1,43.41 110.39,45.7 110.39,49.435 JP2.12@111.65,50.695
LCD_DATA10: JP2.9 R46.1 | length 26.4
  Top Layer w0.254: R46.1@102.91,25.06 104.08,25.06 107.625,28.605 ; 107.63,28.6 107.63,44.28 109.11,45.76 JP2.9@109.11,48.155
LCD_DATA11: JP2.10 R47.1 | length 35.7
  Top Layer w0.254: R47.1@95.646,24.633 97.513,24.633 99.09,26.21 104.12,26.21 107.12,29.21 107.12,45.08 107.78,45.74 107.78,49.365 JP2.10@109.11,50.695
LCD_DATA12: JP2.7 R48.1 | length 21.7
  Top Layer w0.254: 103.576,28.064 104.144,28.064 106.66,30.58 JP2.7@106.66,48.155
LCD_DATA13: JP2.8 R49.1 | length 31.9
  Top Layer w0.254: R49.1@95.646,28.064 97.414,28.064 99.11,29.76 104.16,29.76 106.2,31.8 106.2,44.69 105.24,45.65 105.24,49.365 JP2.8@106.57,50.695